# Allegro board #Taaaach15224.brd
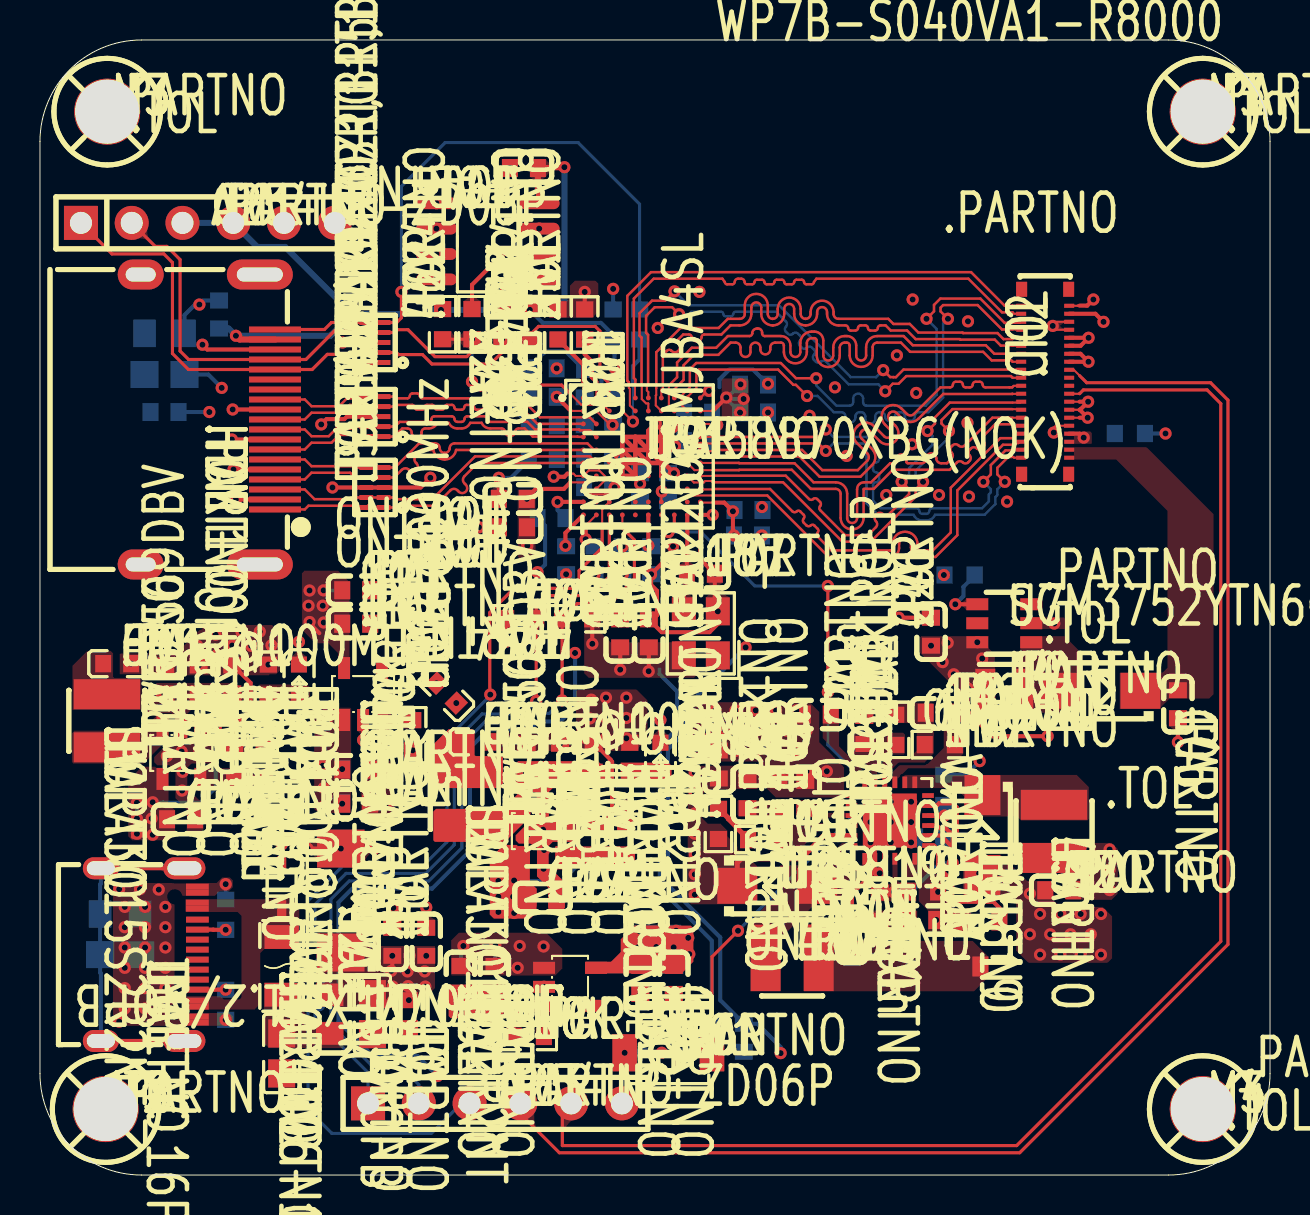
[diagram p0: board, top side]
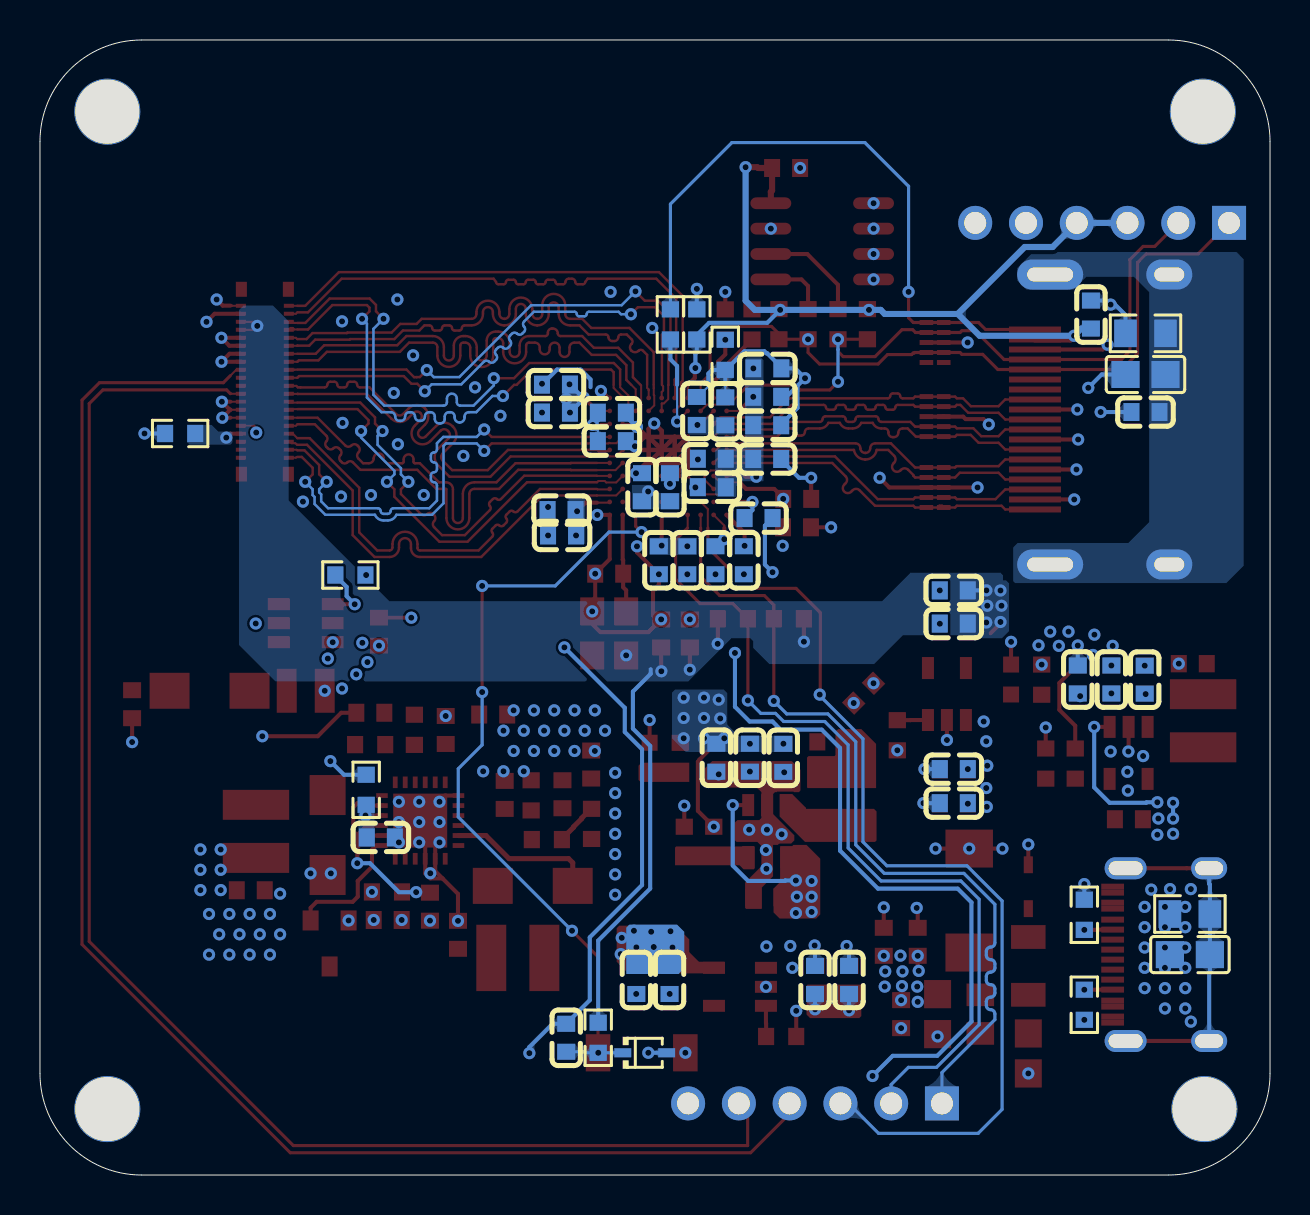
[diagram p1: board, bottom side, seen from below]

Outline 61.54 x 56.77 mm; copper layers: TOP, GND, PWOER, BOTTOM. Coordinates in mm from the lower left corner of the outline.
Outline path: 0,51.69 arc(1.49,55.28) 5.08,56.77 56.46,56.77 arc(60.06,55.28) 61.54,51.69 61.54,5.08 arc(60.06,1.49) 56.46,0 5.08,0 arc(1.49,1.49) 0,5.08 0,51.69

## Design rules (mm)
constraint set DEFAULT: min track width 0.203
net group MIPI_DIS1: nets MIPI_DSI1_CLK_N MIPI_DSI1_CLK_P MIPI_DSI1_DATA0_N MIPI_DSI1_DATA0_P MIPI_DSI1_DATA1_N MIPI_DSI1_DATA1_P MIPI_DSI1_DATA2_N MIPI_DSI1_DATA2_P MIPI_DSI1_DATA3_N MIPI_DSI1_DATA3_P
net group MIPI_DSI0: nets MIPI_DSI0_CLK_N MIPI_DSI0_CLK_P MIPI_DSI0_DATA0_N MIPI_DSI0_DATA0_P MIPI_DSI0_DATA1_N MIPI_DSI0_DATA1_P MIPI_DSI0_DATA2_N MIPI_DSI0_DATA2_P MIPI_DSI0_DATA3_N MIPI_DSI0_DATA3_P

## Placement (name value [footprint] x y rotation side)
C1  4u7  [C0805]  12.09 6.08 270 top
C2  47uF  [CASE-C]  15.05 13.73 270 top
C3  4u7  [C0805]  16.63 8.05 270 top
C4  100n  [C0603]  17.63 11.66 90 top
C5  10n  [C0603]  18.46 8.05 270 top
C6  1n  [C0603]  19.33 11.66 90 top
C7  4u7  [C0805]  4.01 11.02 180 bottom
C8  1n  [C0603]  15.82 20.3 0 bottom
C9  10n  [C0603]  15.82 18.6 0 bottom
C10  100n  [C0603]  15.82 18.57 0 top
C11  10u  [C0603]  15.82 20.27 0 top
C12  1n  [C0603]  15.82 27.57 0 top
C13  10n  [C0603]  15.82 29.25 0 top
C14  100n  [C0603]  15.82 27.58 0 bottom
C15  10u  [C0603]  15.82 29.24 0 bottom
C16  4u7  [C0603]  7.06 17.79 0 top
C17  1n  [C0603]  6.26 24.78 270 top
C18  10n  [C0603]  7.94 24.78 270 top
C19  100n  [C0603]  9.62 24.78 270 top
C20  10u  [C0603]  6.27 24.78 270 bottom
C21  10u  [C0603]  7.94 24.78 270 bottom
C22  22u  [C0603]  9.62 24.78 270 bottom
C23  10n  [C0603]  21.06 9.76 270 bottom
C24  100n  [C0603]  21.04 9.76 270 top
C25  10u  [C0603]  22.74 9.76 270 top
C26  10n  [C0603]  31.71 9.76 270 top
C27  100n  [C0603]  30.04 9.75 270 bottom
C28  10u  [C0603]  31.71 9.75 270 bottom
C29  4u7  [C0603]  25.14 13.88 0 top
C30  1n  [C0603]  22.77 9.76 270 bottom
C31  1n  [C0603]  30.04 9.76 270 top
C32  1n  [C0603]  24.35 20.87 270 top
C33  10n  [C0603]  26.02 20.87 270 top
C34  100n  [C0603]  27.7 20.87 270 top
C35  10u  [C0603]  24.35 20.86 270 bottom
C36  10u  [C0603]  26.02 20.87 270 bottom
C37  22u  [C0603]  27.7 20.87 270 bottom
C38  4u7  [C0603]  40.63 12.01 90 top
C39  22u  [C0603]  33.97 20.53 90 top
C40  18p  [C0603]  35.4 19.04 270 top
C41  220n  [C0603]  41.24 22.26 90 top
C42  18p  [C0603]  45.01 23.12 0 top
C43  4u7  [C0603]  44.15 12.76 180 top
C44  100n  [C0603]  42.03 13.42 270 top
C45  10u  [C0603]  56.93 23.55 270 top
C46  22u  [C0603]  44.58 27.17 90 top
C47  100n  [C0603]  44.49 16.89 180 bottom
C48  10n  [C0603]  38.29 19.01 90 top
C49  4n7  [C0603]  38.87 23.03 180 top
C50  22u  [C0603]  51 14.24 0 top
C51  4u7  [C0805]  6.23 40.04 180 bottom
C52  10n  [C0603]  6.23 38.16 180 bottom
C53  100n  [C0603]  8.96 43.04 90 bottom
C54  100n  [C0603]  24.21 50.37 180 top
C55  10u  [C0603]  25.16 37.5 0 bottom
C56  100n  [C0603]  25.16 38.92 0 bottom
C57  10u  [C0603]  25.15 40.35 0 bottom
C58  100n  [C0603]  25.16 35.81 0 bottom
C59  100n  [C0603]  23.67 32.39 180 top
C60  10u  [C0603]  23.66 33.82 180 top
C61  10u  [C0603]  29.16 30.75 270 bottom
C62  100n  [C0603]  32.93 38.13 180 bottom
C63  100n  [C0603]  28.68 38.22 90 bottom
C64  10u  [C0603]  32.93 36.71 180 bottom
C65  100n  [C0603]  30.58 30.75 270 bottom
C66  10u  [C0603]  27.26 38.2 90 bottom
C67  18p  [C0603]  33.06 30.08 0 top
C68  100n  [C0603]  25.59 32.86 180 bottom
C69  100n  [C0603]  26.32 30.75 270 bottom
C70  100n  [C0603]  27.75 30.75 270 bottom
C71  10u  [C0603]  27.93 35.82 0 bottom
C72  100n  [C0603]  27.93 34.4 0 bottom
C73  100n  [C0603]  30.03 34.4 90 bottom
C74  10u  [C0603]  31.42 34.4 90 bottom
C75  10u  [C0603]  29.03 27.09 90 top
C76  100n  [C0603]  30.46 27.09 90 top
C77  10u  [C0603]  35.42 31.99 0 bottom
C78  100n  [C0603]  35.73 38.14 0 bottom
C79  100n  [C0603]  35.45 33.26 0 bottom
C80  10u  [C0603]  35.73 39.53 0 bottom
C81  100n  [C0603]  35.22 6.86 270 bottom
CH1  A254UP-ZD06P  [HDR-TH-6P]  8.4 47.62 0 top
CH2  -  [WP7B-S040VA1-R8000]  50.29 39.67 90 top
CH3  A254UP-ZD06P  [HDR-TH-6P]  22.77 3.58 0 top
D1  H5VHD3U  [SOD-323]  12.09 14.42 90 top
D2  1N5819  [DO-214AC]  36.89 14.46 0 top
D3  1N5819  [DO-214AC]  53.06 24.22 180 top
D4  1N5819  [DO-214AC]  47.15 17 270 top
D5  H3V3HD3U  [SOD-323]  31.29 6.11 180 bottom
ESD1  IP4292CZ10-TBR,115  [DFN2510A-10]  16.76 34.39 90 top
ESD2  IP4292CZ10-TBR,115  [DFN2510A-10]  16.76 37.93 90 top
ESD3  IP4292CZ10-TBR,115  [DFN2510A-10]  16.76 41.64 90 top
F1  SMD1206-100-30  [PTC1206]  12.09 10.46 270 top
FB1  220R@100MHz  [FB0805]  14.5 8.05 90 top
FB2  600R@100MHz  [FB0603]  20.33 24.1 135 top
FB3  600R@100MHz  [FB0603]  3.86 25.58 0 top
FB4  600R@100MHz  [FB0603]  21.95 21.66 0 top
HDMI1  -  [HDMI-001S]  8.4 37.79 270 top
L1  SWPA3015S2R2NT  [SMD3015]  3.35 22.72 270 top
L2  SWPA3015S2R2NT  [SMD3015]  21.43 18.81 270 top
L3  4.7uH  [SMD3015]  37.64 10.86 0 top
L4  10uH  [SMD252012]  48.25 24.22 0 top
L5  4.7uH  [SMD3015]  50.74 17.19 270 top
LED1  Red  [LED0603]  12.96 24.78 270 top
LED2  Red  [LED0603]  31.04 20.87 270 top
M1  -  [M3]  58.24 53.12 0 top
M2  -  [M3]  3.35 3.24 0 top
M3  -  [M3]  3.43 53.12 0 top
M4  -  [M3]  58.24 3.24 0 top
Q1  AO3401A  [SOT-23]  47.05 11.58 90 top
R1  1M  [R0805]  4.01 13.05 180 bottom
R2  5K11  [R0603]  9.29 13.02 90 bottom
R3  5K11  [R0603]  9.29 8.52 270 bottom
R4  10K  [R0603]  18.65 22 90 top
R5  41K2  [R0603]  9.75 20.58 90 top
R6  1K  [R0603]  11.43 24.78 270 top
R7  9K09  [R0603]  11.22 20.58 270 top
R8  10K  [R0603]  24.46 6.93 0 top
R9  7K68  [R0603]  27.83 16.67 90 top
R10  1K  [R0603]  29.51 20.86 270 top
R11  9K09  [R0603]  29.31 16.67 270 top
R12  43K2  [R0603]  33.95 17.56 90 top
R13  909K  [R0603]  36.18 16.78 0 top
R14  274K  [R0603]  42.81 22.27 90 top
R15  274K  [R0603]  36.97 18.99 90 top
R16  100R  [R0603]  44.18 14.16 180 top
R17  1M2  [R0603]  45.02 21.53 0 top
R18  100K  [R0603]  45.22 19.27 270 bottom
R19  10K  [R0603]  46.01 30.01 0 bottom
R20  1M  [R0805]  6.23 42.1 180 bottom
R21  46K4  [R0603]  24.57 42.55 90 top
R22  46K4  [R0603]  20.14 42.55 90 top
R23  22R  [R0603]  23.11 42.55 270 top
R24  22R  [R0603]  21.62 42.55 270 top
R25  46K4  [R0603]  26.88 27.82 180 top
R26  46K4  [R0603]  24.07 27.82 0 top
R27  10K  [R0603]  33.62 6.86 270 bottom
R28  1K  [R0603]  30 42.54 90 bottom
R29  10K  [R0603]  27.26 42.54 270 top
R30  100K  [R0603]  28.68 42.54 90 bottom
R31  2K  [R0603]  25.92 42.54 90 top
R32  10K  [R0603]  27.26 41.02 90 bottom
R33  9R09  [R0603]  54.53 37.09 0 bottom
SW1  1.6N  [SMD4030]  31.44 6.11 0 top
U1  TYPE-C_16PIN  [TYPEC_16PIN]  5.46 11.02 270 top
U2  TLV62569DBV  [SOT-23-5]  7.08 21.11 90 top
U3  LP5907MFX-1.8/NOPB  [SOT-23-5]  16.17 24.06 270 top
U4  TLV62569DBV  [SOT-23-5]  25.16 17.2 90 top
U5  LP5907MFX-1.2/NOPB  [SOT-23-5]  26.52 9.41 180 top
U6  TPS65131RGER  [VQFN-24]  42.52 17.73 90 top
U7  SGM3752YTN6G  [SOT23-6]  48.25 27.6 0 top
U8  AT24C02  [SOIC8-N]  22.41 46.7 270 top
U9  TC358870XBG(NOK)  [VFBGA80]  30.11 35.94 0 top
U10  OT322540MJBA4SL  [SMD3225-4P]  33.06 27.09 90 top

## Library data of the parts
C1 C3-C81 = CAP_NP: Tolerance: .TOL; User Part Number: .PARTNO
C2 = CAP_TANTALUM: Tolerance: .TOL; User Part Number: .PARTNO
CH1 CH3 = TH-6P: Tolerance: .TOL; User Part Number: .PARTNO
CH2 = WP7B-S040VA1-R8000: Tolerance: .TOL; User Part Number: .PARTNO
D1-D5 = TVS/ESD: Tolerance: .TOL; User Part Number: .PARTNO
ESD1-ESD3 = IP4292CZ10: Tolerance: .TOL; User Part Number: .PARTNO
F1 = Fuse: Tolerance: .TOL; User Part Number: .PARTNO
FB1-FB4 = FerriteBead: Tolerance: .TOL; User Part Number: .PARTNO
HDMI1 = HDMI-A: Tolerance: .TOL; User Part Number: .PARTNO
L1-L5 = Inductor: Tolerance: .TOL; User Part Number: .PARTNO
LED1 LED2 = LED: Tolerance: .TOL; User Part Number: .PARTNO
M1-M4 = M: Tolerance: .TOL; User Part Number: .PARTNO
Q1 = PMOS: Tolerance: .TOL; User Part Number: .PARTNO
R1-R33 = Res: Tolerance: .TOL; User Part Number: .PARTNO
SW1 = Switch-2P: Tolerance: .TOL; User Part Number: .PARTNO
U1 = TYPEC_16PIN: Tolerance: .TOL; User Part Number: .PARTNO
U2 U4 = TLV62569DBV: Tolerance: .TOL; User Part Number: .PARTNO
U3 U5 = LP5907MFX: Tolerance: .TOL; User Part Number: .PARTNO
U6 = TPS65131RGER: Tolerance: .TOL; User Part Number: .PARTNO
U7 = SGM3752YTN6G: Tolerance: .TOL; User Part Number: .PARTNO
U8 = AT24C256: Tolerance: .TOL; User Part Number: .PARTNO
U9 = TC358870XBG_1: Tolerance: .TOL; User Part Number: .PARTNO
U10 = XTAL-4P-Oscillator: Tolerance: .TOL; User Part Number: .PARTNO

## Footprints (pads in the part's own frame, mm; a bottom-side part is the same pattern mirrored in y, then rotated)
C0603
  rect 0.8x0.9 smd: 1(-0.7,0) 2(0.7,0)
C0805
  rect 1.41x1.35 smd: 1(-1,0) 2(1,0)
CASE-C
  rect 1.9x2.376 smd: 1(2.6,0) 2(-2.6,0)
DFN2510A-10
  rect 0.25x0.68 smd: 1(-1,-0.435) 2(-0.5,-0.435) 3(0,-0.435) 4(0.5,-0.435) 5(1,-0.435) 6(1,0.435) 7(0.5,0.435) 8(0,0.435) 9(-0.5,0.435) 10(-1,0.435)
DO-214AC
  rect 2x1.8 smd: 1(-2,0) 2(2,0)
FB0603
  rect 0.8x0.864 smd: 1(-0.7,0) 2(0.7,0)
FB0805
  rect 1.133x1.377 smd: 1(-0.966,0) 2(0.966,0)
HDMI-001S
  rect 0.3x2.6 smd: 1(4.5,3.36) 2(4,3.36) 3(3.5,3.36) 4(3,3.36) 5(2.5,3.36) 6(2,3.36) 7(1.5,3.36) 8(1,3.36) 9(0.5,3.36) 10(0,3.36) 11(-0.5,3.36) 12(-1,3.36) 13(-1.5,3.36) 14(-2,3.36) 15(-2.5,3.36) 16(-3,3.36) 17(-3.5,3.36) 18(-4,3.36) 19(-4.5,3.36)
  oval 1.5x3.3 hole 0.7x2.3: 20(-7.25,2.6) 21(7.25,2.6)
  oval 1.5x2.3 hole 0.7x1.5: 22(-7.25,-3.36) 23(7.25,-3.36)
HDR-TH-6P
  rect 1.7x1.7 hole 1.1: 1(-6.35,0)
  round 1.7 hole 1.1: 2(-3.81,0) 3(-1.27,0) 4(1.27,0) 5(3.81,0) 6(6.35,0)
LED0603
  rect 0.8x0.8 smd: 1(-0.749,0) 2(0.749,0)
M3
  round 3.302 hole 3.2: 1(-0.064,0.064)
PTC1206
  rect 1.19x1.728 smd: 1(-1.445,0) 2(1.445,0)
R0603
  rect 0.806x0.864 smd: 1(-0.753,0) 2(0.753,0)
R0805
  rect 1.133x1.377 smd: 1(-1,0) 2(1,0)
SMD3015
  rect 1.5x3.32 smd: 1(1.328,0) 2(-1.328,0)
SMD3225-4P
  rect 1.4x1.2 smd: 1(-1.1,-0.85) 2(1.1,-0.85) 3(1.1,0.85) 4(-1.1,0.85)
SMD4030
  rect 1.23x1.86 smd: 1(-2.185,0) 2(2.185,0)
SMD252012
  rect 1x2.2 smd: 1(-0.95,0) 2(0.95,0)
SOD-323
  rect 0.845x0.455 smd: 1(-1.098,0) 2(1.098,0)
SOIC8-N
  oval 0.588x2.045 smd: 1(-1.905,-2.57) 2(-0.635,-2.57) 3(0.635,-2.57) 4(1.905,-2.57) 5(1.905,2.57) 6(0.635,2.57) 7(-0.635,2.57) 8(-1.905,2.57)
SOT23-6
  rect 1.1x0.6 smd: 1(1.35,-0.95) 2(1.35,0) 3(1.35,0.95) 4(-1.35,0.95) 5(-1.35,0) 6(-1.35,-0.95)
SOT-23
  rect 1x0.8 smd: 1(1.15,-0.95) 2(1.15,0.95) 3(-1.15,0)
SOT-23-5
  rect 1.1x0.6 smd: 1(1.3,-0.95) 2(1.3,0) 3(1.3,0.95) 4(-1.3,0.95) 5(-1.3,-0.95)
TYPEC_16PIN
  oval 1.1x1.8 hole 0.7x1.4: 1(-4.32,-2.416) 3(4.32,-2.416)
  oval 1.1x2.1 hole 0.7x1.7: 2(-4.32,1.764) 4(4.32,1.764)
  rect 0.3x1.14 smd: A1(-3.4,2.415) A4(-2.6,2.415) A5(-1.25,2.415) A6(-0.25,2.415) A7(0.25,2.415) A8(1.25,2.416) A9(2.6,2.415) A12(3.4,2.415) B1(3.1,2.415) B4(2.3,2.415) B5(1.75,2.415) B6(0.75,2.415) B7(-0.75,2.415) B8(-1.75,2.416) B9(-2.3,2.415) B12(-3.1,2.415)
VFBGA80
  round 0.24 smd: A1(-2.925,2.925) A2(-2.275,2.925) A3(-1.625,2.925) A4(-0.975,2.925) A5(-0.325,2.925) A6(0.325,2.925) A7(0.975,2.925) A8(1.625,2.925) A9(2.275,2.925) A10(2.925,2.925) B1(-2.925,2.275) B2(-2.275,2.275) B3(-1.625,2.275) B4(-0.975,2.275) B5(-0.325,2.275) B6(0.325,2.275) B7(0.975,2.275) B8(1.625,2.275) B9(2.275,2.275) B10(2.925,2.275) C1(-2.925,1.625) C2(-2.275,1.625) C9(2.275,1.625) C10(2.925,1.625) D1(-2.925,0.975) D2(-2.275,0.975) D4(-0.975,0.975) D5(-0.325,0.975) D6(0.325,0.975) D7(0.975,0.975) D9(2.275,0.975) D10(2.925,0.975) E1(-2.925,0.325) E2(-2.275,0.325) E4(-0.975,0.325) E5(-0.325,0.325) E6(0.325,0.325) E7(0.975,0.325) E9(2.275,0.325) E10(2.925,0.325) F1(-2.925,-0.325) F2(-2.275,-0.325) F4(-0.975,-0.325) F5(-0.325,-0.325) F6(0.325,-0.325) F7(0.975,-0.325) F9(2.275,-0.325) F10(2.925,-0.325) G1(-2.925,-0.975) G2(-2.275,-0.975) G4(-0.975,-0.975) G5(-0.325,-0.975) G6(0.325,-0.975) G7(0.975,-0.975) G9(2.275,-0.975) G10(2.925,-0.975) H1(-2.925,-1.625) H2(-2.275,-1.625) H9(2.275,-1.625) H10(2.925,-1.625) J1(-2.925,-2.275) J2(-2.275,-2.275) J3(-1.625,-2.275) J4(-0.975,-2.275) J5(-0.325,-2.275) J6(0.325,-2.275) J7(0.975,-2.275) J8(1.625,-2.275) J9(2.275,-2.275) J10(2.925,-2.275) K1(-2.925,-2.925) K2(-2.275,-2.925) K3(-1.625,-2.925) K4(-0.975,-2.925) K5(-0.325,-2.925) K6(0.325,-2.925) K7(0.975,-2.925) K8(1.625,-2.925) K9(2.275,-2.925) K10(2.925,-2.925)
VQFN-24
  rect 0.584x0.24 smd: 1(-1.913,1.25) 2(-1.913,0.75) 3(-1.913,0.25) 4(-1.913,-0.25) 5(-1.913,-0.75) 6(-1.913,-1.25)
  rect 0.24x0.58 smd: 7(-1.25,-1.913) 8(-0.75,-1.913) 9(-0.25,-1.913) 10(0.25,-1.913) 11(0.75,-1.913) 12(1.25,-1.913) 19(1.25,1.913) 20(0.75,1.913) 21(0.25,1.913) 22(-0.25,1.913) 23(-0.75,1.913) 24(-1.25,1.913)
  rect 0.58x0.24 smd: 13(1.913,-1.25) 14(1.913,-0.75) 15(1.913,-0.25) 16(1.913,0.25) 17(1.913,0.75) 18(1.913,1.25)
  rect 2.7x2.7 smd: 25(-0.001,-0.001)
WP7B-S040VA1-R8000
  rect 0.201x0.5 smd: 1(-3.8,1.199) 2(-3.399,1.199) 3(-3,1.199) 4(-2.598,1.199) 5(-2.2,1.199) 6(-1.798,1.199) 7(-1.4,1.199) 8(-0.998,1.199) 9(-0.599,1.199) 10(-0.201,1.199) 11(0.201,1.199) 12(0.599,1.199) 13(1.001,1.199) 14(1.4,1.199) 15(1.801,1.199) 16(2.2,1.199) 17(2.601,1.199) 18(3,1.199) 19(3.401,1.199) 20(3.8,1.199) 21(3.8,-1.201) 22(3.401,-1.201) 23(3,-1.201) 24(2.601,-1.201) 25(2.2,-1.201) 26(1.801,-1.201) 27(1.4,-1.201) 28(1.001,-1.201) 29(0.599,-1.201) 30(0.201,-1.201) 31(-0.201,-1.201) 32(-0.599,-1.201) 33(-0.998,-1.201) 34(-1.4,-1.201) 35(-1.798,-1.201) 36(-2.2,-1.201) 37(-2.598,-1.201) 38(-3,-1.201) 39(-3.399,-1.201) 40(-3.8,-1.201)
  rect 0.749x0.551 smd: 41(-4.625,-1.176) 42(-4.625,1.176) 43(4.625,1.176) 44(4.625,-1.176)

## Nets
GND: C12.2 C13.2 C14.2 C15.2 C26.2 C27.2 C28.2 C31.2 C51.1 C52.1 C53.2 C54.2 C55.1 C56.1 C57.1 C58.1 C59.2 C60.2 C61.2 C62.2 C63.2 C64.2 C65.2 C66.2 C67.2 C68.2 C69.2 C70.2 C71.2 C72.2 C73.2 C74.2 C75.2 C76.2 C77.2 C78.2 C79.2 C80.2 C81.1 CH1.5 CH1.6 CH2.21 CH2.25 CH2.26 CH2.27 CH2.28 CH2.33 CH2.34 CH2.35 CH3.6 D5.2 ESD1.3 ESD1.8 ESD2.3 ESD2.8 ESD3.3 ESD3.8 FB2.2 HDMI1.2 HDMI1.5 HDMI1.8 HDMI1.11 HDMI1.17 R20.1 R30.2 R32.1 SW1.1 U3.2 U5.2 U8.1 U8.2 U8.3 U8.4 U8.7(WP) U9.A10 U9.C9 U9.D4 U9.D5 U9.D6 U9.D7 U9.E4 U9.E5 U9.E6 U9.E7 U9.F4 U9.F5 U9.F6 U9.F7 U9.G4 U9.G5(TEST) U9.G7 U9.H1 U9.K10 U10.2
PGND: C1.2 C2.2 C3.2 C4.2 C5.2 C6.2 C7.1 C8.2 C9.2 C10.2 C11.2 C16.2 C17.2 C18.2 C19.2 C20.2 C21.2 C22.2 C23.2 C24.2 C25.2 C29.2 C30.2 C32.2 C33.2 C34.2 C35.2 C36.2 C37.2 C38.2 C39.2 C41.2 C43.2 C44.2 C45.2 C46.2 C47.2 C48.2 C49.2 C50.2 D1.2 FB2.1 L5.1 LED1.1(CATHODE) LED2.1(CATHODE) R1.1 R2.2 R3.2 R7.1 R11.1 R15.2 R33.2 U1.A1 U1.A12 U1.B1 U1.B12 U2.2 U4.2 U6.2 U6.3 U6.19 U6.25 U7.2
VCC_1V1: C32.1 C33.1 C34.1 C35.1 C36.1 C37.1 C59.1 C60.1 C61.1 C62.1 C63.1 C64.1 C65.1 C66.1 FB4.2 R9.2 R10.1 U9.B2 U9.C10 U9.G2 U9.K6
VCC_1V2: C26.1 C27.1 C28.1 C31.1 C77.1 C78.1 C79.1 C80.1 U5.5(OUT) U9.B10 U9.J10
VCC_1V8: C12.1 C13.1 C14.1 C15.1 C73.1 C74.1 C75.1 C76.1 CH2.23 CH2.24 R25.1 R26.1 R27.1 U3.5(OUT) U9.J7 U10.4(VDD)
VCC_3V3: C8.1 C9.1 C10.1 C11.1 C17.1 C18.1 C19.1 C20.1 C21.1 C22.1 C23.1 C24.1 C25.1 C30.1 C46.1 C55.2 C56.2 C57.2 C58.2 C71.1 C72.1 FB3.2 L4.1 R4.1 R5.2 R6.1 R8.1 R19.1 R29.1 R31.2 U3.1 U5.1 U7.6(VIN) U9.B1 U9.G1 U9.H2
VCC_5V: C2.1 C3.1 C4.1 C5.1 C6.1 C16.1 C29.1 C43.1 FB1.2 Q1.2 R16.1 R18.1 U2.1 U2.4(VIN) U4.1 U4.4(VIN) U6.5 U6.6
VCC_5V5: C39.1 C40.1 CH2.22 D2.1(CATHODE) R12.1 U6.23
VCC_HDMIRX_IN: C53.1 C54.1 CH1.3 CH1.4 HDMI1.18 R21.2 R22.2 R30.1 U8.8 U9.A4
VCC_LED_AB: C45.1 CH2.39 CH2.40 D3.1(CATHODE)
VEE_5V5: C42.2 C50.1 CH2.36 D4.2 R17.2 U6.15
HDMI_CLK_N: ESD2.5 ESD2.6 HDMI1.12 U9.C2
HDMI_CLK_P: ESD2.4 ESD2.7 HDMI1.10 U9.C1
HDMI_DATA0_N: ESD2.2 ESD2.9(N.C./4) HDMI1.9 U9.D2
HDMI_DATA0_P: ESD2.1 ESD2.10 HDMI1.7 U9.D1
HDMI_DATA1_N: ESD1.5 ESD1.6 HDMI1.6 U9.E2
HDMI_DATA1_P: ESD1.4 ESD1.7 HDMI1.4 U9.E1
HDMI_DATA2_N: ESD1.2 ESD1.9(N.C./4) HDMI1.3 U9.F2
HDMI_DATA2_P: ESD1.1 ESD1.10 HDMI1.1 U9.F1
HDP: ESD3.5 ESD3.6 HDMI1.19 R28.2
I2C_SCL: CH3.2 R25.2 U9.K4
I2C_SDA: CH3.1 R26.2 U9.K3
INT: CH3.3 U9.J3
LED_FB: CH2.37 CH2.38 R33.1
LED_FB_253186: U7.3
MIPI_DSI0_CLK_N: CH2.5 U9.F9
MIPI_DSI0_CLK_P: CH2.6 U9.F10
MIPI_DSI0_DATA0_N: CH2.3 U9.H9
MIPI_DSI0_DATA0_P: CH2.4 U9.H10
MIPI_DSI0_DATA1_N: CH2.7 U9.G9
MIPI_DSI0_DATA1_P: CH2.8 U9.G10
MIPI_DSI0_DATA2_N: CH2.9 U9.E9
MIPI_DSI0_DATA2_P: CH2.10 U9.E10
MIPI_DSI0_DATA3_N: CH2.1 U9.D9
MIPI_DSI0_DATA3_P: CH2.2 U9.D10
MIPI_DSI1_CLK_N: CH2.16 U9.B7
MIPI_DSI1_CLK_P: CH2.15 U9.A7
MIPI_DSI1_DATA0_N: CH2.18 U9.B9
MIPI_DSI1_DATA0_P: CH2.17 U9.A9
MIPI_DSI1_DATA1_N: CH2.14 U9.B8
MIPI_DSI1_DATA1_P: CH2.13 U9.A8
MIPI_DSI1_DATA2_N: CH2.12 U9.B6
MIPI_DSI1_DATA2_P: CH2.11 U9.A6
MIPI_DSI1_DATA3_N: CH2.20 U9.B5
MIPI_DSI1_DATA3_P: CH2.19 U9.A5
PWM: CH2.32 CH3.5
RESETN: C81.2 D5.1(CATHODE) R27.2 SW1.2 U9.K8
RESX: CH2.29 CH3.4
SCL: CH1.1 ESD3.2 ESD3.9(N.C./4) HDMI1.15 R21.1 R23.2 U9.A3
SDA: CH1.2 ESD3.4 ESD3.7 HDMI1.16(SDA) R22.1 R24.2 U9.B3
N236681: D1.1(CATHODE) F1.1 U1.A4 U1.A9 U1.B4(VBUS_3) U1.B9
N236693: C1.1 F1.2 FB1.1
N236737: C7.2 R1.2 U1.1 U1.2 U1.3 U1.4
N236965: R2.1 U1.A5
N237015: R3.1 U1.B5
N238261: L1.1 U2.3
N238489: R5.1 R7.2 U2.5
N242953: L2.1 U4.3
N243181: R9.1 R11.2 U4.5
N255792: D3.2 L4.2 U7.1
N259894: D2.2 L3.2 U6.1 U6.24
N259982: Q1.1 U6.7
N260038: C38.1 L3.1 Q1.3(SOURCE)
N260195: C44.1 R16.2 U6.4 U6.8 U6.9 U6.11
N260318: C47.1 R18.2 U6.10
N262227: R12.2 R13.1
N262241: C40.2 R13.2 R15.1 U6.22
N262519: C41.1 R14.1 U6.17(VREF)
N262525: C42.1 R14.2 R17.1 U6.16
N262973: D4.1(CATHODE) L5.2 U6.13 U6.14
N263055: C48.1 U6.21
N263067: C49.1 U6.18
N271809: C51.2 C52.2 HDMI1.20 HDMI1.21 HDMI1.22 HDMI1.23 R20.2
N279408: R29.2 R32.2 U9.A2
N284077: C68.1 U9.J1
N284159: C69.1 U9.K1
N284174: C70.1 U9.K2
N284871: C67.1 U9.K9 U10.3
N2381410: FB3.1 L1.2
N2382151: LED1.2 R6.2
N2390621: R4.2 U3.3
N2428410: FB4.1 L2.2
N2429111: LED2.2 R10.2
N2437651: R8.2 U5.3
N2531863: R19.2 U7.4
N2739974: R28.1 U9.B4
N3244844: R23.1 U8.5
N3244845: R24.1 U8.6
N27399713: R31.1 U9.A1

Pads without a net: CH2 30 31 41 42 43 44; ESD3 1 10; HDMI1 13 14; M1 1; M2 1; M3 1; M4 1; U1 A6 A7 A8 B6 B7 B8; U3 4; U5 4; U6 12 20; U7 5; U9 G6 J2 J4 J5 J6 J8 J9 K5 K7; U10 1

## Via types
v1: diameter 0.61, hole 0.305, TOP to BOTTOM, 361 vias

## Routing (per net, layer and track width the routed paths; a pad name or vN(x,y) marks a point on that pad's centre or on a via; arc(x,y) is an arc through that point)
GND: length 170.4
  TOP w0.102: v1(33.48,39.22) 33.39,39.22 U9.A10 ; CH2.35 52.02,37.88 ; CH2.21 51.92,43.47 51.93,43.48 52.02,43.48 ; U9.G4 28.75,34.58 v1(28.75,34.39) 28.4,34.04 27.46,34.04 U9.H1 ; CH2.33 52.02,38.68 ; v1(31.67,37.41) 31.83,37.57 U9.C9 ; CH2.34 52.02,38.28
  TOP w0.203: HDMI1.11 v1(9.64,38.29) ; v1(33.66,33.02) U9.K10 33.04,30.8 v1(33.76,30.08) 33.76,28.88 33.91,28.73 v1(33.91,28.19) 33.91,27.56 33.5,27.15 31.1,27.15 v1(30.46,27.79) 30.67,27.79 30.87,28 30.87,29.22 30.58,29.51 v1(30.58,30.05) 31.67,31.14 v1(31.67,31.45) ; C59.2 v1(21.96,32.39) ; CH2.27 52.06,41.07 v1(52.46,40.68) CH2.28 ; v1(19.53,34.87) 19.05,34.39 ESD1.3 ESD1.8 v1(14.63,34.39) ; HDMI1.5 v1(9.69,35.29) ; U3.2 v1(16.17,21.76) ; HDMI1.2 v1(9.8,33.79) ; 52.02,38.28 52.02,38.28 ; 52.02,38.28 v1(52.42,37.88) 52.02,37.88 ; 52.02,38.28 52.04,38.28 v1(52.44,38.68) 52.02,38.68 ; ESD2.3 ESD2.8 15.36,37.93 15.23,37.81 14.34,37.81 v1(14.07,37.54) ; CH2.26 52.07,41.48 v1(52.47,41.87) CH2.25 ; HDMI1.8 v1(9.6,36.79) ; v1(15.13,41.64) ESD3.8 ESD3.3 ; C60.2 v1(22.96,34.87) ; v1(8.13,41.53) 8.37,41.29 HDMI1.17 ; v1(52.7,43.79) 52.4,43.48 52.02,43.48
  TOP w0.229: U9.G5 U9.F5 ; U9.G5 U9.G4 U9.F4 ; U9.G5 29.39,35.36 U9.F4 ; U9.F5 U9.F6 ; U9.F5 U9.E4 ; U9.F5 U9.E5 ; U9.F5 U9.F4 ; U9.F6 U9.E5 ; U9.F6 U9.F7 ; U9.F6 U9.E6 ; U9.E6 U9.E7 ; U9.E6 30.04,36.66 30.04,36.66 U9.D5 ; U9.E6 U9.D6 ; U9.E6 U9.E5 ; U9.E6 30.69,36.52 U9.D7 ; U9.E6 U9.F7 ; U9.E7 31.59,36.27 v1(31.78,36.45) 31.31,36.92 31.18,36.92 ; U9.E7 U9.D7 ; U9.E7 U9.F7 ; U9.F7 U9.G7 31.59,34.97 v1(31.72,35.1) 31.21,35.62 U9.F7 ; U9.D5 U9.D4 ; U9.D5 U9.E5 ; U9.D5 U9.D6 ; U9.D6 30.44,37.22 v1(30.81,37.59) 31.09,37.31 U9.D7 ; U9.D6 U9.D7 ; U9.E4 U9.F4 ; U9.E4 U9.E5 ; U9.E4 29.1,36.27 v1(28.63,35.79) 28.8,35.62 U9.F4 ; U9.E4 U9.D4 ; U9.D4 U9.E5 ; 31.18,36.92 v1(31.67,37.41) ; 31.18,36.92 U9.D7
  BOTTOM w0.102: C63.2 28.63,38.92 28.1,39.44 28.1,39.52 ; C74.2 v1(31.72,35.1) ; C73.2 v1(30.03,34.57) ; C66.2 27.26,39.52
  BOTTOM w0.203: C68.2 25.27,32.48 25.27,30.53 v1(24.89,30.15) ; R20.1 7.23,43.01 7.75,43.54 v1(7.98,43.54) 8.18,43.74 C53.2 ; 34,39.41 34,39.79 34.49,40.28 35.67,40.28 C80.2 v1(36.43,39.58) ; 28.1,39.52 28.1,40.08 27.92,40.27 R32.1 ; v1(35.31,26.39) 32.28,23.37 32.28,22.16 31.42,21.29 31.42,14.5 34.04,11.89 34.04,8.74 C81.1 35.89,7.56 37.06,6.4 v1(37.06,6.1) ; R32.1 27.23,40.27 26.3,41.2 25.3,41.2 25.2,41.1 25.15,41.1 24.45,40.4 C57.1 23.76,40.35 v1(23.27,39.85) 23.64,39.48 ; R32.1 27.26,39.52 ; C56.1 24.2,38.92 23.64,39.48 ; R30.2 v1(28.68,44.32) ; v1(9.09,39.37) 8.42,40.04 C51.1 ; C55.1 24.46,37.55 23.64,38.36 23.64,39.48 ; v1(22.96,34.87) 23.57,34.87 24.46,35.76 C58.1 ; D5.2 v1(31.11,6.11) ; C52.1 v1(8.47,38.16) ; v1(26.77,26.11) 26.77,23.42 26.04,22.68 24.89,22.68 24.49,22.28 22.43,22.28 21.51,21.36 21.51,16.22 19.62,14.32 15.63,14.32 14.94,13.63 14.94,7.68 16.65,5.96 18.88,5.96 v1(19.89,4.95)
  BOTTOM w0.229: C64.2 32.03,36.71 v1(31.78,36.45) ; v1(31.67,37.41) 32.23,37.97 C62.2
  vias: v1(16.52,29.24) v1(16.52,27.57) v1(19.84,48.6) v1(19.84,47.33) v1(19.84,46.06) v1(19.84,44.79) v1(19.84,24.6) v1(23.51,50.37) v1(24.98,47.33) v1(25.22,9.41) v1(26.32,30.05) v1(27.75,30.05) v1(29.03,27.79) v1(29.16,30.05) v1(29.25,6.11) v1(30.04,9.06) v1(30.91,42.37) v1(31.71,9.06) v1(32.99,44.17) v1(36.12,33.41) v1(36.12,31.99) v1(36.43,38.14) v1(38.51,37.97) v1(39.78,39.4) v1(40.36,35.97) v1(42.34,34.01) v1(42.88,41) v1(43.66,43.79) v1(43.64,36.55) v1(43.84,39.12) v1(44.98,34.01) v1(46.41,37.62) v1(46.43,42.7) v1(46.48,33.93) v1(48.39,33.68)
PGND: length 34.7
  TOP w0.203: 41.4,14.83 41.77,15.2 U6.2 41.77,16.98 42.27,17.48 ; 41.4,14.83 42.01,14.83 42.27,15.09 ; 41.4,14.83 40.63,14.06 v1(40.63,12.71) ; 42.27,15.09 U6.3 42.27,17.48 ; 42.27,15.09 v1(42.02,15.09) ; v1(17.68,13.36) 17.63,13.31 C4.2 ; v1(21.06,8.24) 21.04,8.27 C24.2 ; D1.2 v1(12.09,16.53) ; U4.2 25.16,17.28 v1(25.17,17.27) ; U2.2 7.08,21.19 v1(7.09,21.18) ; LED1.1 v1(12.96,26.67) ; C46.2 v1(42.97,27.87) ; C6.2 v1(19.33,13.39) ; R11.1 v1(29.31,18.47) ; U6.19 41.27,18.98 U6.25 42.27,17.48 ; v1(17.34,18.6) 17.31,18.57 C10.2 ; v1(13.39,16.33) v1(15.05,16.33) v1(16.73,16.33) ; C3.2 v1(16.63,6.93) ; C45.2 v1(56.93,21.65) ; R7.1 v1(11.22,22.38) ; LED2.1 v1(31.04,22.76)
  BOTTOM w0.203: C30.2 v1(22.77,8.29) ; C33.2 v1(26.02,20.18) ; C23.2 v1(21.06,8.24) ; R2.2 v1(9.29,14.55) ; C8.2 v1(17.29,20.3) ; R33.2 v1(56.31,37.09) ; C18.2 v1(7.94,24.09) ; C9.2 v1(17.34,18.6)
  vias: v1(3.96,14.3) v1(3.96,7.67) v1(4.24,13.41) v1(4.24,12.4) v1(4.24,11.38) v1(4.24,10.36) v1(4.24,9.35) v1(4.24,8.33) v1(5,14.3) v1(5.26,13.41) v1(5.26,12.4) v1(5.26,11.38) v1(5.26,10.36) v1(5.26,9.35) v1(5.26,8.33) v1(5.94,14.27) v1(6.22,24.05) v1(6.27,13.41) v1(6.27,12.4) v1(6.27,11.38) v1(6.27,10.36) v1(6.27,9.35) v1(6.35,20.95) v1(7.11,19.23) v1(7.14,20.17) v1(7.98,21.18) v1(9.29,7.76) v1(9.5,23.95) v1(12.09,5.08) v1(18.46,7.35) v1(20.83,23.61) v1(24.31,20.14) v1(24.43,17.04) v1(25.2,15.32) v1(25.22,16.26) v1(26.06,17.27) v1(27.58,20.04) v1(33.27,22.22) v1(33.78,23.24) v1(33.78,21.21) v1(34.29,22.22) v1(34.8,23.24) v1(34.8,21.21) v1(35.31,22.22) v1(35.81,23.24) v1(35.81,21.21) v1(36.32,22.22) v1(36.83,23.24) v1(36.83,21.21) v1(37.34,22.22) v1(37.34,20.19) v1(37.85,23.24) v1(37.85,21.21) v1(38.35,22.22) v1(38.35,20.19) v1(39.37,20.19) v1(41.24,22.96) v1(41.55,18.67) v1(41.55,17.65) v1(41.55,16.64) v1(42.03,12.72) v1(42.57,18.67) v1(42.57,17.65) v1(42.57,16.64) v1(43.45,12.76) v1(43.59,18.67) v1(43.59,17.65) v1(43.59,16.64) v1(50.75,27.58) v1(52.5,16.28) v1(52.5,15.27) v1(52.5,14.25) v1(53.52,16.28) v1(53.52,15.27) v1(53.52,14.25)
VCC_1V1: length 14
  TOP w0.102: U9.G2 27.52,34.65 26.54,34.65 ; U9.B2 28.54,37.52 v1(28.65,37.52) ; 33.68,37.52 33.53,37.52 33.48,37.57 U9.C10
  TOP w0.203: C34.1 27.75,21.57 28.55,20.78 28.55,20.75 28.63,20.68 28.63,18.21 v1(27.83,17.42) ; U9.K6 v1(30.44,31.48) ; v1(33.88,37.52) 33.68,37.52 ; 26.54,34.65 26.21,34.32 24.81,34.32 24.36,33.87 v1(24.36,33.82)
  BOTTOM w0.102: 33.68,37.31 33.63,37.26 C64.1
  BOTTOM w0.203: v1(33.88,37.52) 33.68,37.31
  BOTTOM w0.229: C62.1 33.63,37.77 v1(33.88,37.52)
  vias: v1(24.38,31.47) v1(24.35,21.57) v1(26.02,21.57) v1(27.3,21.84) v1(27.51,22.83) v1(27.58,23.77) v1(28.32,23.88) v1(28.32,22.86) v1(28.32,21.84) v1(29.16,31.45) v1(29.34,23.88) v1(29.34,22.86) v1(29.34,21.84)
VCC_1V2: length 8.5
  TOP w0.102: U9.J10 33.07,33.63 33.68,33.63 ; U9.B10 33.67,38.22 33.68,38.23
  TOP w0.203: v1(34.72,31.99) 34.67,32.04 v1(34.67,33.2) 34.24,33.63 33.68,33.63 ; v1(34.34,38.89) 33.68,38.23
  BOTTOM w0.203: v1(35.03,38.14) 34.34,38.82 v1(34.34,38.89) ; C28.1 v1(31.71,11.39) ; v1(35.2,38.81) 34.41,38.81 v1(34.34,38.89) ; v1(34.34,38.89) 34.38,38.89 C80.1
  vias: v1(29.9,11.38) v1(30,12.19) v1(30.84,11.4) v1(30.96,12.17) v1(31.83,12.22) v1(32.44,11.86) v1(32.49,11.05) v1(35.05,39.55)
VCC_1V8: length 28.9
  TOP w0.102: U9.J7 31.09,34.16 v1(31.12,34.19) ; CH2.24 50.87,42.28 v1(50.67,42.47) 50.88,42.67 CH2.23
  TOP w0.203: C75.1 v1(29.03,25.27) 29.03,25.27 ; 32.21,25.98 v1(32.21,25.99) ; v1(27.64,26.57) 27.63,26.57 R25.1 ; 13.98,27.1 13.49,27.59 v1(13.49,27.66) ; v1(30.45,25.2) 30.46,25.21 C76.1 ; R26.1 v1(23.32,26.67)
  BOTTOM w0.102: v1(31.12,34.19) 31.42,33.88 C74.1
  BOTTOM w0.203: R27.1 33.62,11.72 31.01,14.33 31.01,21.46 31.88,22.33 31.88,24.18 30.99,25.07 30.99,25.3 ; C15.1 v1(14.19,29.24)
  vias: v1(13.49,29.24) v1(13.44,28.47) v1(14.15,28.47) v1(14.2,27.64)
VCC_3V3: length 15.5
  TOP w0.102: 26.54,35.08 26.7,35.08 26.81,34.97 U9.G1 27.46,35.24 27.98,35.24 28.3,34.92 28.3,34.77 U9.H2 ; 26.54,38.24 26.56,38.22 U9.B1
  TOP w0.203: v1(25.7,34.92) 26.24,34.92 26.39,35.08 26.54,35.08 ; 26.54,38.24 v1(25.86,38.92) ; 27.25,44.17 v1(27.26,44.17) R29.1 ; R8.1 v1(23.71,8.21) ; C19.1 9.67,25.48 10.54,24.61 10.54,23.27 9.75,22.47 R5.2
  BOTTOM w0.203: C30.1 22.77,11.46 v1(22.78,11.48) ; R19.1 v1(45.22,30.01) ; C23.1 21.06,11.34 v1(21.18,11.46) ; C19.1 v1(9.62,26.48)
  vias: v1(4.56,25.58) v1(6.27,25.48) v1(7.87,26.47) v1(7.94,25.48) v1(8.79,27.03) v1(8.86,26.01) v1(10.08,27.18) v1(10.57,26.47) v1(11,27.18) v1(11.43,25.53) v1(11.58,26.49) v1(14.2,21.69) v1(14.15,20.47) v1(14.2,19.35) v1(14.17,18.41) v1(14.33,22.68) v1(15.12,20.3) v1(15.12,18.57) v1(18.65,21.24) v1(23.9,10.36) v1(24,11.46) v1(25.2,11.43) v1(25.85,40.35) v1(44.58,26.47) v1(45.16,25.65) v1(45.42,26.62) v1(45.72,25.04) v1(46.43,24.33) v1(46.9,26.65) v1(47.14,25.83) v1(47.3,24.22)
VCC_5V: length 18.7
  TOP w0.203: v1(17.58,10.21) 17.63,10.26 v1(17.63,10.96) ; 22.73,13 22.78,13 v1(22.94,13.16) ; v1(4.85,17.07) 4.7,16.92 4.65,16.92 ; U2.1 v1(8.8,22.41) ; U4.1 v1(26.88,18.5)
  BOTTOM w0.203: v1(5.64,18.64) 6.17,18.64 6.2,18.62 8.03,18.62 8.8,19.39 v1(8.8,22.41) ; R18.1 46.33,20.02 v1(47.02,20.7) ; v1(23.72,14.73) 24.26,14.73 24.28,14.71 26.11,14.71 26.88,15.48 v1(26.88,18.5) ; v1(4.85,18.62) v1(4.85,17.83)
  vias: v1(5.59,17.83) v1(5.64,17.02) v1(17.65,9.42) v1(17.63,8.66) v1(18.39,10.19) v1(18.41,9.45) v1(18.49,10.97) v1(18.46,8.75) v1(19.25,10.19) v1(19.28,9.42) v1(19.33,10.96) v1(22.94,14.71) v1(22.94,13.92) v1(23.67,13.92) v1(23.72,13.11) v1(44.85,12.76) v1(44.94,14.16) v1(46.1,12.73)
VCC_5V5: length 9.3
  TOP w0.203: CH2.22 52.81,43.08 v1(53.21,42.67)
  TOP w0.254: D2.1 34.89,15.62 35.1,15.82 38.07,15.82 39.23,16.98 U6.23
  vias: v1(32.77,20.12) v1(32.77,19.1) v1(32.77,18.08) v1(32.77,17.07) v1(32.77,16.05) v1(32.77,15.04) v1(32.77,14.02)
VCC_HDMIRX_IN: length 48.4
  TOP w0.102: U9.A4 29.14,39.38 29.12,39.39 29.12,39.52
  TOP w0.203: 29.12,39.52 28.78,39.87 28.78,40.34 v1(28.75,40.36)
  TOP w0.305: v1(26.24,50.41) 25.65,50.41 25.61,50.37 C54.1 24.91,49.24 24.98,49.18 U8.8 ; v1(9.8,41.97) 9.99,41.79 HDMI1.18
  BOTTOM w0.203: v1(28.75,40.36) 28.75,41.08 28.68,41.16 R30.1 28.68,42.01 28.07,42.62 25.16,42.62 v1(24.51,43.27)
  BOTTOM w0.305: v1(26.24,50.41) 26.24,43.73 25.78,43.27 v1(24.51,43.27) v1(20.07,43.27) 19.48,43.27 19.28,43.07 15.62,43.07 ; 8.91,42.34 C53.1 9.44,42.34 v1(9.8,41.97) 14.53,41.97 15.62,43.07 ; CH1.3 CH1.4 10.88,46.42 12.27,46.42 15.62,43.07
VEE_5V5: length 6.2
  TOP w0.102: CH2.36 50.83,37.48 50.72,37.37 v1(50.72,37.13)
  TOP w0.203: C42.2 46.47,23.12 47.65,21.95 v1(50.42,21.95)
  vias: v1(46.99,15.09) v1(48.01,15.09) v1(49.53,14.07) v1(49.53,12.04) v1(50.04,13.06) v1(50.04,11.02) v1(50.55,12.04) v1(51.05,13.06) v1(51.05,11.02) v1(51.56,12.04) v1(52.07,13.06) v1(52.07,11.02) v1(52.58,12.04) v1(53.09,13.06) v1(53.09,11.02)
HDMI_CLK_N: length 17.3
  TOP w0.124: HDMI1.12 13.25,38.79 13.59,38.45 14.97,38.45 15.36,38.85 15.67,38.85 15.76,38.93 ESD2.6 ESD2.5 17.76,38.93 17.85,38.85 18.38,38.85 arc(18.47,38.88) 18.51,38.97 arc(18.54,39.05) 18.63,39.09 18.88,39.09 arc(18.97,39.05) 19,38.97 arc(19.04,38.88) 19.12,38.85 24.07,38.85 25.02,37.9 27.51,37.9 U9.C2
HDMI_CLK_P: length 17.3
  TOP w0.124: HDMI1.10 13.25,37.79 13.59,38.13 15.1,38.13 15.5,38.52 15.67,38.52 15.76,38.43 ESD2.7 ESD2.4 17.76,38.43 17.85,38.52 18.63,38.52 arc(18.71,38.48) 18.75,38.4 arc(18.78,38.31) 18.87,38.28 19.12,38.28 arc(19.21,38.31) 19.24,38.4 arc(19.28,38.48) 19.36,38.52 19.62,38.52 arc(19.7,38.48) 19.74,38.4 arc(19.78,38.31) 19.86,38.28 20.12,38.28 arc(20.2,38.31) 20.24,38.4 arc(20.27,38.48) 20.36,38.52 20.61,38.52 arc(20.7,38.48) 20.73,38.4 arc(20.77,38.31) 20.85,38.28 21.11,38.28 arc(21.19,38.31) 21.23,38.4 arc(21.26,38.48) 21.35,38.52 21.6,38.52 arc(21.69,38.48) 21.72,38.4 arc(21.76,38.31) 21.84,38.28 22.1,38.28 arc(22.18,38.31) 22.22,38.4 arc(22.25,38.48) 22.34,38.52 23.93,38.52 24.88,37.57 27.18,37.57 U9.C1
HDMI_DATA0_N: length 17.5
  TOP w0.124: U9.D2 27.51,37.25 27.04,37.25 27.03,37.26 27,37.26 26.97,37.29 24.77,37.29 24.38,37.67 22.53,37.67 arc(22.43,37.71) 22.39,37.81 arc(22.35,37.91) 22.25,37.95 21.38,37.95 arc(21.28,37.91) 21.24,37.81 arc(21.2,37.71) 21.1,37.67 20.88,37.67 arc(20.78,37.71) 20.74,37.81 arc(20.7,37.91) 20.6,37.95 19.73,37.95 arc(19.63,37.91) 19.59,37.81 arc(19.55,37.71) 19.45,37.67 18,37.67 17.76,37.43 ESD2.2 ESD2.9 15.76,37.43 15.67,37.35 14.84,37.35 14.45,36.95 13.59,36.95 13.25,37.29 HDMI1.9
HDMI_DATA0_P: length 17.5
  TOP w0.124: HDMI1.7 13.25,36.29 13.59,36.62 14.58,36.62 14.98,37.02 15.67,37.02 15.76,36.93 ESD2.10 ESD2.1 17.72,36.93 18.13,37.34 18.38,37.34 arc(18.54,37.28) 18.6,37.12 arc(18.66,36.97) 18.82,36.91 18.88,36.91 arc(19.03,36.97) 19.1,37.12 19.1,37.16 arc(19.15,37.29) 19.27,37.34 19.45,37.34 arc(19.71,37.42) 19.88,37.62 20.45,37.62 arc(20.63,37.42) 20.88,37.34 21.1,37.34 arc(21.35,37.42) 21.52,37.62 22.1,37.62 arc(22.27,37.42) 22.53,37.34 23.09,37.34 arc(23.22,37.29) 23.27,37.16 arc(23.33,37.03) 23.45,36.98 23.59,36.98 arc(23.72,37.03) 23.77,37.16 arc(23.82,37.29) 23.95,37.34 24.25,37.34 24.65,36.93 26.89,36.93 26.9,36.92 27.18,36.92 U9.D1
HDMI_DATA1_N: length 17.4
  TOP w0.124: HDMI1.6 13.25,35.79 13.59,35.45 15.69,35.45 15.76,35.39 ESD1.6 ESD1.5 17.76,35.39 18.97,36.59 19.76,36.59 arc(19.93,36.52) 20,36.35 arc(20.07,36.19) 20.24,36.12 20.26,36.12 arc(20.42,36.17) 20.5,36.32 arc(20.5,36.34) 20.5,36.35 arc(20.57,36.52) 20.74,36.59 27.39,36.59 27.72,36.27 U9.E2
HDMI_DATA1_P: length 17.4
  TOP w0.124: HDMI1.4 13.25,34.79 13.59,35.13 15.52,35.13 15.76,34.89 ESD1.7 ESD1.4 17.76,34.89 17.85,34.97 17.85,35.01 18.11,35.27 arc(18.28,35.35) 18.46,35.27 18.49,35.25 arc(18.84,35.25) 18.84,35.6 18.81,35.62 arc(18.74,35.8) 18.81,35.97 19.1,36.27 19.68,36.27 arc(19.87,35.92) 20.24,35.79 20.26,35.79 arc(20.63,35.92) 20.82,36.27 U9.E1
HDMI_DATA2_N: length 17.4
  TOP w0.124: U9.F2 27.51,35.94 26.27,35.94 26.26,35.94 21.77,35.94 19.63,33.8 17.85,33.8 17.76,33.89 ESD1.2 ESD1.9 15.76,33.89 15.67,33.8 13.74,33.8 13.25,34.29 HDMI1.3
HDMI_DATA2_P: length 17.3
  TOP w0.124: U9.F1 27.19,35.61 21.9,35.61 21.24,34.95 arc(21.16,34.77) 21.24,34.6 21.3,34.53 arc(21.3,34.18) 20.95,34.18 20.89,34.25 arc(20.71,34.32) 20.54,34.25 19.76,33.47 17.85,33.47 17.76,33.39 ESD1.1 16.63,33.39 16.54,33.47 16.41,33.47 ESD1.10 15.76,33.39 15.67,33.47 13.43,33.47 13.25,33.29 HDMI1.1
HDP: length 32.5
  TOP w0.156: HDMI1.19 14.23,42.29 14.58,42.64 ESD3.6 ESD3.5 17.85,42.64 18.08,42.88 v1(18.08,44.17)
  BOTTOM w0.156: R28.2 30,48.56 26.92,51.64 20.27,51.64 18.08,49.45 v1(18.08,44.17)
I2C_SCL: length 43.6
  TOP w0.102: U9.K4 29.14,32.36 29.14,32.36
  TOP w0.156: v1(26.12,23.74) R25.2 26.88,28.58 28.51,28.58 29.74,29.81 29.74,31.76 29.14,32.36
  BOTTOM w0.156: v1(26.12,23.74) 25.48,23.09 24.74,23.09 24.33,22.68 22.28,22.68 21.11,21.51 21.11,16.36 19.46,14.71 15.47,14.71 14.55,13.79 14.55,7.52 16.69,5.38 18.09,5.38 18.96,4.52 CH3.2
I2C_SDA: length 42.9
  TOP w0.102: 28.49,32.36 U9.K3
  TOP w0.156: v1(24.83,23.71) R26.2 24.83,28.51 25.3,28.98 27.53,28.98 28.49,29.94 28.49,32.36
  BOTTOM w0.156: v1(24.83,23.71) 24.18,23.06 22.12,23.06 20.73,21.67 20.73,16.51 19.3,15.09 15.32,15.09 13.77,13.54 13.77,11.61 arc(13.83,11.46) 13.98,11.4 arc(14.13,11.34) 14.19,11.19 14.19,10.99 arc(14.13,10.84) 13.98,10.77 arc(13.83,10.71) 13.77,10.56 13.77,10.36 arc(13.83,10.21) 13.98,10.15 arc(14.13,10.08) 14.19,9.93 14.19,9.74 arc(14.13,9.58) 13.98,9.52 arc(13.83,9.46) 13.77,9.31 13.77,9.11 arc(13.83,8.96) 13.98,8.9 arc(14.13,8.83) 14.19,8.68 14.19,8.48 arc(14.13,8.33) 13.98,8.27 arc(13.83,8.21) 13.77,8.06 13.77,7.77 16.42,5.12 CH3.1
INT: length 50
  TOP w0.102: U9.J3 28.13,33.31 28.13,32.36
  TOP w0.156: 28.13,32.36 28.13,31.38 26.97,30.23 26.97,29.5 26.82,29.34 23.71,29.34 22.5,28.13 22.5,24.05 v1(22.53,24.03)
  BOTTOM w0.156: v1(22.53,24.03) 22.53,23.98 20.37,21.82 20.37,16.66 19.17,15.47 15.16,15.47 13.41,13.71 13.41,3.28 14.61,2.08 19.58,2.08 21.08,3.58 CH3.3
LED_FB: length 0.8
  TOP w0.203: CH2.37 52.03,37.08 v1(52.22,36.88)
MIPI_DSI0_CLK_N: length 23
  TOP w0.102: U9.F9 32.75,35.26 33.68,35.26 ; CH2.5 48.74,37.48 48.67,37.55
  TOP w0.124: 33.68,35.26 34.98,35.26 34.99,35.27 37.62,35.27 38.57,34.32 39.81,34.32 arc(39.99,34.25) 40.06,34.07 40.06,32.86 arc(40.63,32.28) 41.21,32.86 41.21,34.3 arc(41.22,34.31) 41.23,34.32 41.72,34.32 42.67,35.27 45.51,35.27 45.89,35.65 arc(46.03,35.7) 46.16,35.65 arc(46.3,35.59) 46.44,35.65 46.51,35.72 arc(46.57,35.86) 46.51,36 arc(46.46,36.13) 46.51,36.27 46.59,36.35 arc(46.73,36.4) 46.86,36.35 arc(47,36.29) 47.14,36.35 47.22,36.42 arc(47.27,36.56) 47.22,36.7 arc(47.16,36.84) 47.22,36.97 47.79,37.55 48.67,37.55
MIPI_DSI0_CLK_P: length 22.9
  TOP w0.102: 48.67,37.88 CH2.6 ; U9.F10 33.68,35.62
  TOP w0.124: 33.68,35.62 34.98,35.62 34.99,35.6 37.75,35.6 38.71,34.65 39.81,34.65 arc(40.22,34.48) 40.39,34.07 40.39,32.86 arc(40.63,32.61) 40.88,32.86 40.88,34.3 arc(40.98,34.54) 41.23,34.65 41.58,34.65 42.53,35.6 42.78,35.6 arc(42.83,35.62) 42.85,35.67 42.85,35.79 arc(43.1,36.04) 43.35,35.79 43.35,35.67 arc(43.37,35.62) 43.42,35.6 44.1,35.6 arc(44.28,35.67) 44.35,35.85 arc(44.6,36.09) 44.85,35.85 arc(44.92,35.67) 45.09,35.6 45.38,35.6 45.61,35.83 arc(45.67,35.99) 45.61,36.14 arc(45.55,36.29) 45.61,36.44 45.66,36.49 arc(45.81,36.55) 45.96,36.49 arc(46.11,36.42) 46.27,36.49 47.66,37.88 48.67,37.88
MIPI_DSI0_DATA0_N: length 23
  TOP w0.102: CH2.3 49.02,36.68 48.95,36.6 48.77,36.6 48.69,36.53 48.67,36.53 ; U9.H9 32.72,33.99 33.68,33.99 33.68,33.99
  TOP w0.124: 48.67,36.53 48.18,36.53 45.9,34.24 45.9,32 44.81,30.91 44.05,30.91 arc(43.72,31.05) 43.58,31.39 43.58,31.56 arc(43.28,31.85) 42.98,31.56 42.98,31.36 arc(42.85,31.04) 42.54,30.91 39.47,30.91 36.39,33.99 33.68,33.99
MIPI_DSI0_DATA0_P: length 22.9
  TOP w0.102: 48.67,36.85 48.89,37.08 CH2.4 ; U9.H10 33.05,34.32 33.08,34.29 33.65,34.29 33.67,34.31 33.68,34.31
  TOP w0.124: 33.68,34.31 36.53,34.31 37.65,33.19 arc(37.76,33.15) 37.86,33.19 arc(37.95,33.23) 38.04,33.19 38.21,33.02 arc(38.25,32.93) 38.21,32.84 arc(38.17,32.73) 38.21,32.63 38.35,32.49 arc(38.46,32.45) 38.57,32.49 arc(38.65,32.53) 38.74,32.49 38.92,32.32 arc(38.95,32.23) 38.92,32.14 arc(38.87,32.03) 38.92,31.92 39.6,31.24 42.54,31.24 arc(42.62,31.27) 42.66,31.36 42.66,31.56 arc(43.28,32.18) 43.91,31.56 43.91,31.39 arc(43.95,31.28) 44.05,31.24 44.67,31.24 45.57,32.14 45.57,34.37 48.05,36.85 48.67,36.85
MIPI_DSI0_DATA1_N: length 23
  TOP w0.102: 33.68,34.65 33.67,34.65 33.61,34.71 33.57,34.71 33.57,34.71 33.29,34.71 33.21,34.64 32.72,34.64 U9.G9 ; 48.67,38.31 49.06,38.31 CH2.7
  TOP w0.124: 33.68,34.65 37.18,34.65 40.15,31.68 41.56,31.68 43.81,33.93 43.81,34.3 v1(44.18,34.67) ; v1(45.48,37.21) 45.11,37.58 45.11,37.76 45.65,38.31 48.67,38.31
  BOTTOM w0.124: v1(45.48,37.21) 45.48,36.89 43.81,35.22 43.81,35.04 v1(44.18,34.67)
MIPI_DSI0_DATA1_P: length 22.9
  TOP w0.102: U9.G10 33.67,34.97 33.68,34.98 ; CH2.8 49.05,38.63 48.67,38.63
  TOP w0.124: 48.67,38.63 45.52,38.63 44.78,37.89 44.78,37.58 v1(44.41,37.21) ; v1(43.11,34.67) 43.48,34.3 43.48,34.06 42.48,33.06 arc(42.33,32.99) 42.17,33.06 arc(42.02,33.12) 41.87,33.06 41.82,33.01 arc(41.76,32.86) 41.82,32.71 arc(41.89,32.55) 41.82,32.4 41.43,32 40.28,32 39.03,33.26 arc(38.99,33.36) 39.03,33.46 arc(39.08,33.56) 39.03,33.66 38.89,33.81 arc(38.78,33.85) 38.68,33.81 arc(38.58,33.77) 38.48,33.81 37.31,34.98 33.68,34.98
  BOTTOM w0.124: v1(43.11,34.67) 43.48,35.04 43.48,35.35 44.65,36.52 44.65,36.97 v1(44.41,37.21)
MIPI_DSI0_DATA2_N: length 23.1
  TOP w0.102: CH2.9 49.09,39.07 48.67,39.07 ; 33.68,35.94 33.67,35.94 33.66,35.95 33.04,35.95 33.03,35.94 32.71,35.94 U9.E9
  TOP w0.124: 33.68,35.94 38,35.94 39.01,34.93 41.05,34.93 41.63,35.5 arc(41.8,35.91) 41.63,36.32 41.11,36.84 arc(41.03,37.01) 41.11,37.19 41.15,37.23 arc(41.32,37.3) 41.5,37.23 42.02,36.71 arc(42.79,36.71) 42.79,37.48 42.51,37.76 arc(42.44,37.94) 42.51,38.11 arc(42.69,38.19) 42.86,38.11 43.14,37.83 arc(43.55,37.66) 43.96,37.83 45.19,39.07 48.65,39.07 48.65,39.07 48.67,39.07
MIPI_DSI0_DATA2_P: length 23
  TOP w0.102: CH2.10 49.09,39.47 49.08,39.47 49.07,39.47 48.72,39.47 48.67,39.42 ; U9.E10 33.1,36.2 33.61,36.2 33.67,36.27 33.68,36.27
  TOP w0.124: 48.67,39.42 48.64,39.4 48.51,39.4 48.51,39.39 47.31,39.39 arc(47.21,39.43) 47.17,39.53 arc(47.12,39.63) 47.02,39.67 46.81,39.67 arc(46.71,39.63) 46.67,39.53 arc(46.63,39.43) 46.53,39.39 46.31,39.39 arc(46.21,39.43) 46.17,39.53 arc(46.13,39.63) 46.03,39.67 45.82,39.67 arc(45.72,39.63) 45.68,39.53 arc(45.64,39.43) 45.54,39.39 45.06,39.39 43.73,38.06 arc(43.55,37.99) 43.38,38.06 43.09,38.34 arc(42.69,38.51) 42.28,38.34 arc(42.11,37.94) 42.28,37.53 42.56,37.25 arc(42.56,36.94) 42.25,36.94 41.73,37.46 arc(41.32,37.63) 40.91,37.46 40.88,37.42 arc(40.71,37.01) 40.88,36.61 41.4,36.09 arc(41.47,35.91) 41.4,35.73 40.92,35.26 39.14,35.26 38.13,36.27 33.68,36.27
MIPI_DSI0_DATA3_N: length 23.1
  TOP w0.102: 48.67,35.92 48.7,35.92 48.74,35.88 CH2.1 ; U9.D9 32.7,36.6 33.02,36.6 33.04,36.62 33.08,36.62 33.11,36.59 33.68,36.59
  TOP w0.124: 48.67,35.92 48.44,35.92 47.9,35.37 47.9,35.04 v1(48.27,34.67) ; v1(39.32,36.22) 38.95,36.59 33.68,36.59
  BOTTOM w0.124: v1(39.32,36.22) 39.69,36.59 41.23,36.59 41.35,36.47 41.35,33.6 41.93,33.02 43.71,33.02 arc(43.88,32.82) 44.14,32.74 44.35,32.74 arc(44.61,32.82) 44.78,33.02 47.27,33.02 47.8,33.56 47.8,33.91 47.9,34.01 47.9,34.3 v1(48.27,34.67)
MIPI_DSI0_DATA3_P: length 23.1
  TOP w0.102: 33.68,36.92 U9.D10 ; 48.67,36.24 48.7,36.28 CH2.2
  TOP w0.124: 33.68,36.92 38.95,36.92 v1(39.32,37.29) ; 48.67,36.24 48.31,36.24 47.57,35.51 47.57,35.04 v1(47.2,34.67)
  BOTTOM w0.124: v1(47.2,34.67) 47.57,34.3 47.57,34.14 47.48,34.04 47.48,33.69 47.13,33.35 44.64,33.35 arc(44.54,33.31) 44.5,33.21 arc(44.45,33.11) 44.35,33.07 44.14,33.07 arc(44.04,33.11) 44,33.21 arc(43.96,33.31) 43.86,33.35 42.06,33.35 41.68,33.73 41.68,34.5 arc(41.73,34.61) 41.83,34.65 arc(41.94,34.7) 41.99,34.81 41.99,35 arc(41.94,35.1) 41.83,35.15 arc(41.73,35.19) 41.68,35.3 41.68,35.49 arc(41.73,35.6) 41.83,35.64 arc(41.94,35.69) 41.99,35.8 41.99,35.99 arc(41.94,36.1) 41.83,36.14 arc(41.73,36.18) 41.68,36.29 41.68,36.6 41.37,36.92 39.69,36.92 v1(39.32,37.29)
MIPI_DSI1_CLK_N: length 26.8
  TOP w0.102: CH2.16 48.74,41.87 48.67,41.81 48.67,41.81 ; 30.84,39.52 30.84,39.45 30.84,39.37 30.84,39.35 30.83,39.35 30.83,39.01 30.81,38.99 30.81,38.49 U9.B7
  TOP w0.124: 48.67,41.81 48.21,41.81 47.91,42.11 46.19,42.11 46.16,42.14 43.95,42.14 43.52,42.57 42.7,42.57 42.45,42.82 39.95,42.82 arc(39.78,42.89) 39.71,43.07 39.71,43.16 arc(39.13,43.74) 38.56,43.16 38.56,43.07 arc(38.48,42.89) 38.31,42.82 arc(38.13,42.89) 38.06,43.07 38.06,43.32 arc(37.49,43.89) 36.91,43.32 36.91,43.07 arc(36.84,42.89) 36.66,42.82 arc(36.49,42.89) 36.41,43.07 36.41,43.5 arc(35.84,44.07) 35.26,43.5 35.26,43.07 arc(35.19,42.89) 35.02,42.82 34.41,42.82 33.96,42.37 32.05,42.37 30.84,41.16 30.84,39.52
MIPI_DSI1_CLK_P: length 26.7
  TOP w0.102: 31.17,39.52 31.17,39.37 31.09,39.29 31.09,39.24 31.09,39.24 U9.A7 ; 48.67,41.48 CH2.15
  TOP w0.124: 48.67,41.48 48.66,41.48 48.07,41.48 47.77,41.78 46.05,41.78 46.02,41.81 43.81,41.81 43.38,42.24 42.56,42.24 42.31,42.49 42.05,42.49 arc(41.96,42.46) 41.92,42.37 arc(41.88,42.27) 41.79,42.24 41.55,42.24 arc(41.46,42.27) 41.43,42.37 arc(41.39,42.46) 41.3,42.49 41.06,42.49 arc(40.97,42.46) 40.93,42.37 arc(40.89,42.27) 40.8,42.24 40.56,42.24 arc(40.47,42.27) 40.43,42.37 arc(40.4,42.46) 40.31,42.49 39.95,42.49 arc(39.55,42.66) 39.38,43.07 39.38,43.16 arc(39.13,43.41) 38.88,43.16 38.88,43.07 arc(38.72,42.66) 38.31,42.49 arc(37.9,42.66) 37.73,43.07 37.73,43.32 arc(37.49,43.57) 37.24,43.32 37.24,43.07 arc(37.07,42.66) 36.66,42.49 arc(36.26,42.66) 36.09,43.07 36.09,43.4 arc(35.84,43.64) 35.59,43.4 35.59,43.07 arc(35.42,42.66) 35.02,42.49 34.55,42.49 34.1,42.04 33.24,42.04 arc(33.14,42) 33.1,41.91 arc(33.05,41.77) 32.91,41.71 32.8,41.71 arc(32.67,41.77) 32.61,41.91 arc(32.57,42) 32.48,42.04 32.18,42.04 31.94,41.79 arc(31.89,41.69) 31.94,41.58 31.95,41.56 arc(32.02,41.4) 31.95,41.23 arc(31.77,41.15) 31.59,41.23 arc(31.48,41.27) 31.38,41.23 31.17,41.02 31.17,39.52
MIPI_DSI1_DATA0_N: length 26.9
  TOP w0.102: U9.B9 32.11,38.5 32.11,38.99 32.52,39.4 32.52,39.52 ; CH2.18 49.04,42.62 48.79,42.62 48.79,42.62 48.67,42.62
  TOP w0.124: 32.52,39.52 32.52,40.29 32.83,40.61 37.07,40.61 37.83,39.85 v1(38.84,39.85) ; 48.67,42.62 48.27,42.62 47.05,43.84 45.05,43.84 44.73,43.52 44.73,43.2 v1(44.36,42.82)
  BOTTOM w0.124: v1(44.36,42.82) 44.86,42.32 44.86,39.02 44.32,38.48 41.35,38.48 arc(41.23,38.53) 41.18,38.65 41.18,38.83 arc(40.94,39.08) 40.69,38.83 40.69,38.65 arc(40.64,38.53) 40.52,38.48 39.85,38.48 38.84,39.5 v1(38.84,39.85)
MIPI_DSI1_DATA0_P: length 26.9
  TOP w0.102: 48.67,42.29 48.82,42.29 48.89,42.37 49,42.37 CH2.17 ; U9.A9 32.38,38.87 32.38,38.91 32.84,39.37 32.84,39.52
  TOP w0.124: v1(38.38,38.96) 37.82,39.52 37.69,39.52 36.93,40.28 32.97,40.28 32.84,40.16 32.84,39.52 ; 48.67,42.29 48.13,42.29 46.91,43.51 45.19,43.51 45.06,43.38 45.06,43.19 v1(45.43,42.82)
  BOTTOM w0.124: v1(38.38,38.96) 38.91,38.96 39.72,38.15 40.08,38.15 arc(40.24,38.09) 40.3,37.94 40.3,37.89 arc(40.37,37.71) 40.55,37.64 arc(40.72,37.71) 40.8,37.89 40.8,37.94 arc(40.86,38.09) 41.01,38.15 41.08,38.15 arc(41.23,38.09) 41.29,37.94 41.29,37.81 arc(41.36,37.66) 41.51,37.59 41.57,37.59 arc(41.73,37.66) 41.79,37.81 41.79,37.94 arc(41.85,38.09) 42.01,38.15 42.07,38.15 arc(42.22,38.09) 42.28,37.94 arc(42.35,37.78) 42.5,37.72 42.56,37.72 arc(42.72,37.78) 42.78,37.94 arc(42.84,38.09) 43,38.15 43.06,38.15 arc(43.21,38.09) 43.28,37.94 arc(43.34,37.78) 43.49,37.72 43.55,37.72 arc(43.71,37.78) 43.77,37.94 arc(43.84,38.09) 43.99,38.15 44.45,38.15 45.19,38.89 45.19,42.58 v1(45.43,42.82)
MIPI_DSI1_DATA1_N: length 26.7
  TOP w0.102: 31.5,39.52 31.47,39.49 31.47,38.49 U9.B8 ; CH2.14 48.67,41.07
  TOP w0.124: 31.5,39.52 31.88,39.9 31.88,40.64 32.61,41.38 33.83,41.38 34.42,41.96 35.51,41.96 arc(35.6,42) 35.63,42.09 arc(35.71,42.26) 35.88,42.34 35.93,42.34 arc(36.07,42.28) 36.13,42.14 36.13,42.09 arc(36.17,42) 36.26,41.96 37.08,41.96 arc(37.41,41.82) 37.55,41.49 37.55,41.16 arc(37.8,40.92) 38.04,41.16 38.04,41.61 arc(38.21,42.02) 38.62,42.18 38.74,42.18 arc(39.06,42.05) 39.19,41.73 39.19,40.99 arc(39.44,40.74) 39.69,40.99 39.69,41.39 arc(39.86,41.79) 40.26,41.96 40.37,41.96 arc(40.7,41.82) 40.84,41.49 40.84,40.99 arc(41.09,40.74) 41.34,40.99 41.34,41.41 arc(41.5,41.8) 41.89,41.96 43.21,41.96 43.67,41.5 47.32,41.5 47.75,41.07 48.67,41.07
MIPI_DSI1_DATA1_P: length 26.8
  TOP w0.102: U9.A8 31.74,39.3 31.96,39.52 ; CH2.13 48.67,40.68
  TOP w0.124: 31.96,39.52 32.2,39.77 32.2,40.5 32.72,41.02 33.94,41.02 34.55,41.63 34.8,41.63 arc(34.98,41.56) 35.05,41.39 35.05,41.16 arc(35.3,40.92) 35.55,41.16 35.55,41.39 arc(35.8,41.63) 36.04,41.39 36.04,41.29 arc(36.29,41.05) 36.54,41.29 36.54,41.39 arc(36.61,41.56) 36.79,41.63 37.08,41.63 arc(37.18,41.59) 37.22,41.49 37.22,41.16 arc(37.8,40.59) 38.37,41.16 38.37,41.61 arc(38.44,41.78) 38.62,41.86 38.74,41.86 arc(38.83,41.82) 38.87,41.73 38.87,40.99 arc(39.44,40.41) 40.02,40.99 40.02,41.39 arc(40.09,41.56) 40.26,41.63 40.37,41.63 arc(40.47,41.59) 40.51,41.49 40.51,40.99 arc(41.09,40.41) 41.66,40.99 41.66,41.41 arc(41.73,41.57) 41.89,41.63 43.08,41.63 43.54,41.17 47.19,41.17 47.61,40.75 48.59,40.75 48.67,40.68
MIPI_DSI1_DATA2_N: length 26.9
  TOP w0.102: CH2.12 49.09,40.28 48.8,40.28 48.79,40.28 48.67,40.28 ; 30.1,39.52 30.1,39.51 30.11,39.5 30.11,38.81 30.33,38.59 30.43,38.59 30.44,38.58 U9.B6
  TOP w0.124: v1(31.75,44.2) 31.28,43.73 30.62,43.73 30,43.1 30,41.99 30.1,41.88 30.1,39.52 ; v1(42.19,40.26) 42.54,39.91 42.69,39.91 42.7,39.9 42.82,39.9 43.21,40.28 48.67,40.28
  BOTTOM w0.124: v1(42.19,40.26) 41.84,39.91 40.56,39.91 36.97,43.5 32.44,43.5 v1(31.75,44.2)
MIPI_DSI1_DATA2_P: length 26.8
  TOP w0.102: U9.A6 30.44,39.16 30.37,39.24 30.37,39.45 30.43,39.51 30.43,39.52 ; 48.67,39.88 CH2.11
  TOP w0.124: 48.67,39.88 48.58,39.96 43.34,39.96 42.96,39.58 42.67,39.58 v1(42.29,39.2) ; v1(31.98,43.05) 31.63,43.4 30.76,43.4 30.32,42.97 30.32,42.12 30.43,42.02 30.43,39.52
  BOTTOM w0.124: v1(31.98,43.05) 32.47,43.05 32.59,43.18 34.08,43.18 arc(34.16,43.14) 34.19,43.06 arc(34.22,42.98) 34.3,42.95 34.57,42.95 arc(34.65,42.98) 34.69,43.06 arc(34.72,43.14) 34.8,43.18 36.83,43.18 37.32,42.69 arc(37.38,42.56) 37.32,42.43 arc(37.27,42.3) 37.32,42.17 37.42,42.08 arc(37.54,42.03) 37.67,42.08 arc(37.8,42.13) 37.93,42.08 38.02,41.99 arc(38.08,41.86) 38.02,41.73 arc(37.97,41.6) 38.02,41.47 38.12,41.38 arc(38.25,41.32) 38.37,41.38 arc(38.5,41.43) 38.63,41.38 38.73,41.28 arc(38.78,41.16) 38.73,41.03 arc(38.67,40.9) 38.73,40.77 38.82,40.68 arc(38.95,40.62) 39.08,40.68 arc(39.2,40.73) 39.33,40.68 40.46,39.55 41.94,39.55 v1(42.29,39.2)
MIPI_DSI1_DATA3_N: length 26.8
  TOP w0.102: U9.B5 29.51,38.49 29.51,39.32 29.46,39.37 29.46,39.52 ; CH2.20 48.67,43.47
  TOP w0.124: 29.46,39.52 29.46,39.65 29.39,39.73 29.39,43.97 30.57,45.16 46.59,45.16 48.27,43.47 48.67,43.47
MIPI_DSI1_DATA3_P: length 26.9
  TOP w0.102: 29.79,39.52 29.79,39.51 29.77,39.49 29.77,38.89 U9.A5 ; CH2.19 48.74,43.08 48.67,43.15
  TOP w0.124: 29.79,39.52 29.79,39.78 29.71,39.86 29.71,43.84 30.71,44.83 34.14,44.83 34.26,44.66 arc(34.3,44.58) 34.38,44.55 34.65,44.55 arc(34.73,44.58) 34.76,44.66 arc(34.81,44.78) 34.93,44.83 35.09,44.83 arc(35.21,44.78) 35.25,44.66 arc(35.29,44.58) 35.37,44.55 35.64,44.55 arc(35.72,44.58) 35.75,44.66 arc(35.78,44.74) 35.86,44.78 36.13,44.78 arc(36.21,44.74) 36.25,44.66 arc(36.28,44.58) 36.36,44.55 36.63,44.55 arc(36.71,44.58) 36.74,44.66 arc(36.78,44.74) 36.86,44.78 37.13,44.78 arc(37.21,44.74) 37.24,44.66 arc(37.27,44.58) 37.35,44.55 37.62,44.55 arc(37.7,44.58) 37.73,44.66 arc(37.77,44.74) 37.85,44.78 38.12,44.78 arc(38.2,44.74) 38.23,44.66 arc(38.26,44.58) 38.34,44.55 38.61,44.55 arc(38.69,44.58) 38.73,44.66 38.85,44.83 46.45,44.83 48.13,43.15 48.67,43.15
PWM: length 74.3
  TOP w0.102: CH2.32 51.97,39.08 52.02,39.08
  TOP w0.156: CH3.5 26.14,3.14 26.14,1.47 48.87,1.47 59.08,11.68 59.08,38.58 58.39,39.27 52.21,39.27 52.02,39.08 52.02,39.08
RESETN: length 39.7
  TOP w0.156: U9.K8 31.74,32.45 v1(31.45,32.16) ; v1(33.61,6.11) SW1.2 33.62,10.92 v1(34.92,12.22) ; v1(39.42,29.46) v1(39.42,24.16)
  BOTTOM w0.156: v1(34.92,12.22) 40.61,17.91 40.61,20.32 39.42,21.51 v1(39.42,24.16) ; v1(31.45,32.16) 33.07,32.16 35.76,29.46 v1(39.42,29.46) ; D5.1 v1(33.61,6.11) R27.2 34.25,6.11 34.31,6.16 C81.2
RESX: length 76.8
  TOP w0.102: CH2.29 51.72,40.27 52.02,39.98
  TOP w0.156: CH3.4 24.04,3.07 25.99,1.11 49.02,1.11 59.44,11.54 59.44,38.76 58.57,39.63 52.37,39.63 52.02,39.98
SCL: length 37.2
  TOP w0.102: 28.49,39.52 U9.A3
  TOP w0.156: 28.49,39.52 28.49,39.58 28.02,40.06 28.02,42.21 27.78,42.44 24.94,42.44 24.57,42.07 R21.1 v1(23.11,41.8) 23.11,41.14 22.54,40.56 19.61,40.56 19.14,41.03 17.93,41.03 17.86,41.11 17.81,41.11 17.78,41.14 ESD3.2 ESD3.9 15.51,41.14 15.42,41.05 14.38,41.05 13.62,40.29 HDMI1.15 7.43,40.29 6.63,41.09 6.63,45.64 6.2,46.07 3.6,46.07 CH1.1
SDA: length 35.8
  TOP w0.102: U9.B3 28.17,38.53 27.08,38.53 26.54,39.07
  TOP w0.156: CH1.2 5.77,46.45 6.35,46.45 7.01,45.78 7.01,41.21 7.44,40.79 HDMI1.16 13.31,40.79 14.75,42.23 15.42,42.23 15.51,42.14 ESD3.7 ESD3.4 17.74,42.14 17.88,42.28 18.41,42.28 19.76,40.93 21.36,40.93 21.62,41.19 v1(21.62,41.8) R22.1 ; v1(21.62,39.67) 22.02,39.27 23.51,39.27 23.75,39.51 26.1,39.51 26.54,39.07
  BOTTOM w0.156: v1(21.62,39.67) 21.62,41.29 21.62,41.29 v1(21.62,41.8)
N236737: length 17
  TOP w0.203: U1.3 4.17,6.7 4.17,6.7 U1.4 ; U1.1 4.17,15.34 4.17,15.34 U1.2
  BOTTOM w0.203: U1.1 3.05,14.56 3.01,14.53 R1.2 C7.2 3.01,10.12 3.05,10.08 U1.3
N236965: length 1.4
  TOP w0.203: v1(9.29,12.26) 8.68,12.26 8.67,12.27 U1.A5
N237015: length 1.4
  TOP w0.203: v1(9.29,9.27) 8.68,9.27 8.67,9.27 U1.B5
N259982: length 6.5
  TOP w0.203: U6.7 44.73,16.48 44.93,16.28 44.93,15.42 45.64,14.71 45.64,14.7 45.64,13.92 45.9,13.67 47.7,13.67 48,13.36 Q1.1
N260195: length 11.6
  TOP w0.203: U6.8 45.07,16.98 45.67,16.38 ; 45.67,16.38 45.67,16.99 ; 45.67,16.38 v1(45.67,15.6) ; 45.67,16.99 45.31,17.35 45.01,17.35 44.88,17.48 U6.9 ; 45.67,16.99 45.87,17.2 45.87,18.39 45.67,18.59 44.98,18.59 44.87,18.48 U6.11 ; C44.1 42.7,14.12 v1(42.72,14.15)
  BOTTOM w0.203: v1(45.67,15.6) 45.03,15.6 43.59,14.15 v1(42.72,14.15)
